# Altium PCB haptic_ring.PcbDoc
Units mil, origin at the board's own origin, x right, y up, seen from the top; angles counter-clockwise.
Board outline 6000 x 4000 mil, 2 copper layers (Top Layer, Bottom Layer); 10 components, 4 nets, 92 pads, 16 vias.
Unrouted connection lines stored in the file: 15.
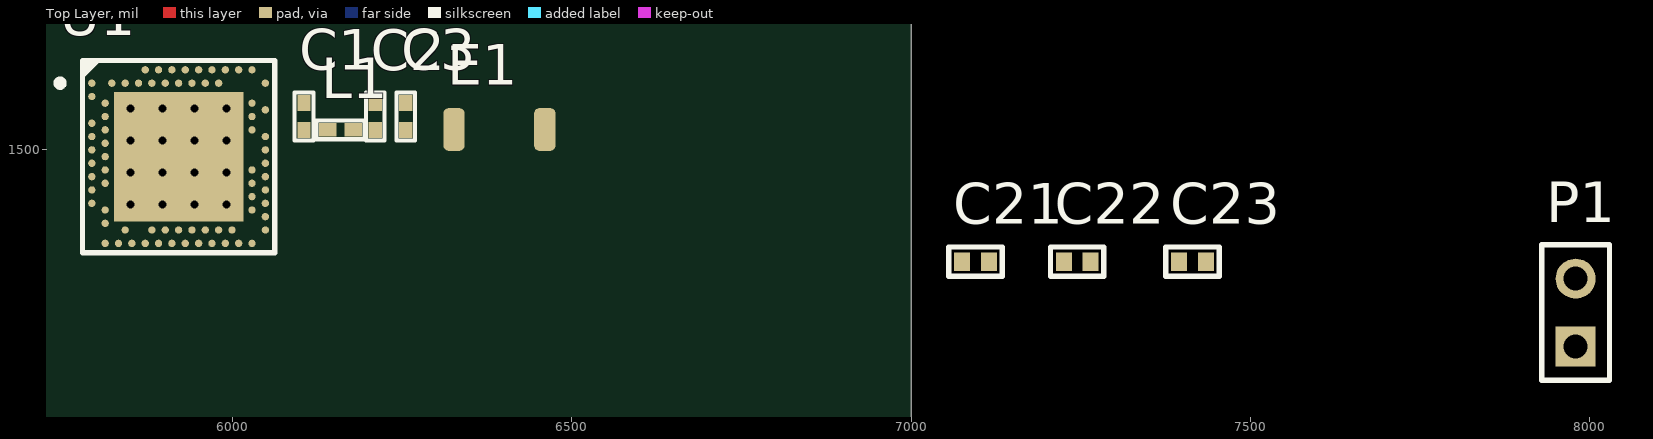
[diagram p0: Top Layer view]
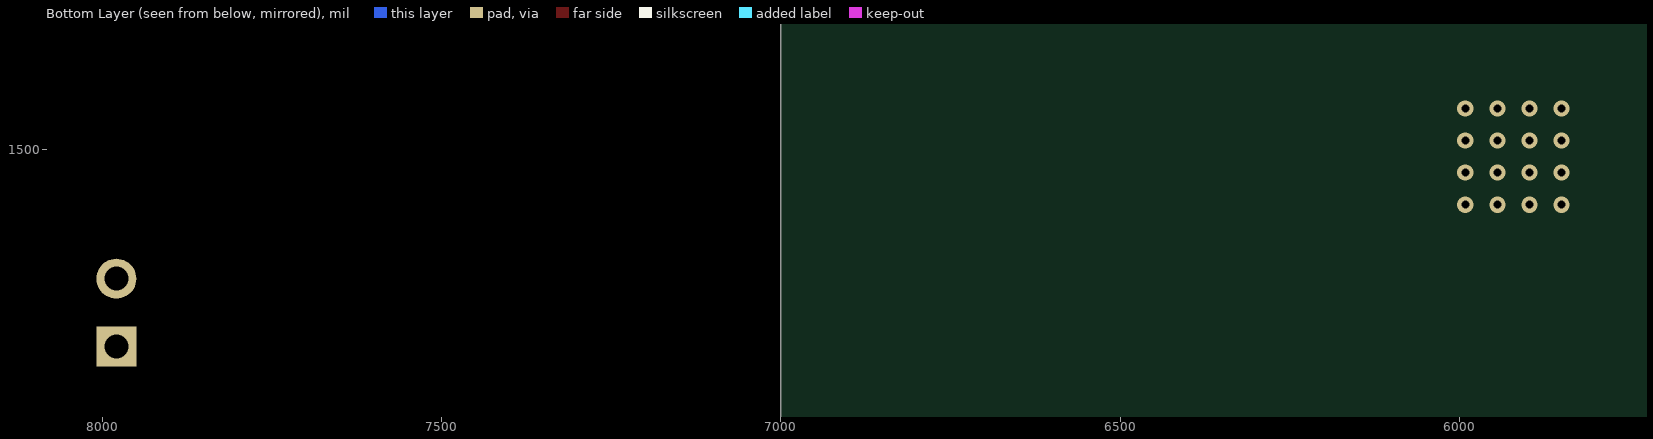
[diagram p1: Bottom Layer view, seen from below]

## Layer stack, top to bottom
Top Solder: solder mask 0.4, Solder Resist, Dk 3.5
Top Layer: signal copper 1.4
Dielectric 1: dielectric 12.6, FR-4, Dk 4.8
Bottom Layer: signal copper 1.4
Bottom Solder: solder mask 0.4, Solder Resist, Dk 3.5

## Board outline
1000,1000 7000,1000 7000,5000 1000,5000

## Design rules (kind name [scope] priority, off if disabled: settings)
Clearance [All] p1: gap=10 ignorepadtopadclearanceinfootprint=TRUE except(0: Arc-Hole Track-Hole SMDPad-Hole THPad-Hole Via-Hole Fill-Hole Poly-Hole Region-Hole Text-Hole)
PolygonConnect [All] p1: connectstyle=Relief reliefconductorwidth=10 reliefentries=4 polygonreliefangle="90 Angle" airgapwidth=10
RoutingVias [All] p1: holewidth=28 width=50 viastyle="Through Hole" minholewidth=28 minwidth=50 maxholewidth=28 maxwidth=50
SolderMaskExpansion [All] p1: expansion=4
Width [All] p1: maxlimit=10 minlimit=10 preferedwidth=10
30 further rules are at their usual default settings.

## Components (designator, comment, footprint, x,y, rotation, side; value= is the part's Value field where it differs from the comment)
C1 "0.8pF" C_1005 6105,1549.06 r270 top
C2 "0.5pF" C_1005 6210,1549.06 r270 top
C3 "N.C." C_1005 6255,1549.06 r90 top
C21 "Cap Semi" C_0402 7095,1335 r0 top value=10uF
C22 "Cap Semi" C_0402 7245,1335 r0 top value=10uF
C23 "Cap Semi" C_0402 7415,1335 r0 top value=100nF
E1 "Antenna" 2450AT18B100 6393.07,1530 r0 top
L1 "4.7nH" L_1005 6158.7,1529.37 r0 top
P1 "PWR" HDR1X2 7980,1210 r90 top
U1 "nRF52840-QIAA" AQFN50P700X700X85_HS-74N 5920,1490 r0 top

## Footprints (in the part's own frame and the unit in brackets; to place one, negate y for a bottom-side part, rotate by r counter-clockwise, add the part's x,y. Pads: shape width x height; smd on the part's side, far side on the other; paste and mask are expansions set on the pad)
2450AT18B100 [mm] "2450 MHz Antenna"
  rrect50% 0.8x1.6 smd: 1(-1.7,0) 2(1.7,0)
  body extent -1.6,-0.8 1.6,0.8, height 1.4
AQFN50P700X700X85_HS-74N [mm]
  rect 4.85x4.85 smd mask+0.05: 74(0,0)
  round 0.275 smd paste+0.012 mask+0.05: A8(-1.25,3.25) A10(-0.75,3.25) A12(-0.25,3.25) A14(0.25,3.25) A16(0.75,3.25) A18(1.25,3.25) A20(1.75,3.25) A22(2.25,3.25) A23(2.75,3.25) AA24(3.25,-2.25) AB2(-2.75,-2.5) AC5(-2,-2.75) AC9(-1,-2.75) AC11(-0.5,-2.75) AC13(0,-2.75) AC15(0.5,-2.75) AC17(1,-2.75) AC19(1.5,-2.75) AC21(2,-2.75) AC24(3.25,-2.75) AD2(-2.75,-3.25) AD4(-2.25,-3.25) AD6(-1.75,-3.25) AD8(-1.25,-3.25) AD10(-0.75,-3.25) AD12(-0.25,-3.25) AD14(0.25,-3.25) AD16(0.75,-3.25) AD18(1.25,-3.25) AD20(1.75,-3.25) AD22(2.25,-3.25) AD23(2.75,-3.25) B1(-3.25,2.75) B3(-2.5,2.75) B5(-2,2.75) B7(-1.5,2.75) B9(-1,2.75) B11(-0.5,2.75) B13(0,2.75) B15(0.5,2.75) B17(1,2.75) B19(1.5,2.75) B24(3.25,2.75) C1(-3.25,2.25) D2(-2.75,2) D23(2.75,2) E24(3.25,1.75) F2(-2.75,1.5) F23(2.75,1.5) G1(-3.25,1.25) H2(-2.75,1) H23(2.75,1) J1(-3.25,0.75) J24(3.25,0.75) K2(-2.75,0.5) L1(-3.25,0.25) L24(3.25,0.25) M2(-2.75,0) N1(-3.25,-0.25) N24(3.25,-0.25) P2(-2.75,-0.5) P23(2.75,-0.5) R1(-3.25,-0.75) R24(3.25,-0.75) T2(-2.75,-1) T23(2.75,-1) U1(-3.25,-1.25) U24(3.25,-1.25) V23(2.75,-1.5) W1(-3.25,-1.75) W24(3.25,-1.75) Y2(-2.75,-2) Y23(2.75,-2)
  silkscreen extent -4.56,-3.6 3.6,3.6, body extent -3.55,-3.55 3.55,3.55, height 0.85
C_0402 [mm]
  rect 0.6x0.7 smd: 1(-0.5,0) 2(0.5,0)
  silkscreen extent -1,-0.55 1,0.55, body extent -0.5,-0.3 0.5,0.3, height 0.2
C_1005 [mm]
  rect 0.6x0.5 smd: 1(-0.5,0) 2(0.5,0)
  silkscreen extent -0.9,-0.35 0.9,0.35, body extent -0.51,-0.25 0.51,0.25, height 0.5
HDR1X2 [mm] "Connector; Header; 2 Position"
  rect 1.5x1.5 hole 0.9: 1(0,0)
  round 1.5 hole 0.9: 2(2.54,0)
  silkscreen extent -1.27,-1.27 3.81,1.27
L_1005 [mm]
  rect 0.65x0.5 smd: 1(-0.475,0) 2(0.475,0)
  silkscreen extent -0.9,-0.35 0.9,0.35, body extent -0.5,-0.3 0.5,0.3, height 0.5

## Part data
C1: library part C0402-0.8p, "Capacitor, NP0, ±10%", Footprint Doc=0402, LatestRevisionDate=2012-11-21, Pad Count=2, Part Number=C0402-0.8p, Published=2009-05-08
C2: library part C0402-0.5p, "Capacitor, NP0, ±10%", Footprint Doc=0402, LatestRevisionDate=2017-02-23, Pad Count=2, Part Number=C0402-0.5p, Published=2009-05-08
C3: library part C0402-N.C., "Not mounted", Assembly="Not mounted", Footprint Doc=0402, LatestRevisionDate=2009-05-08, Pad Count=2, Part Number=C0402-N.C., Published=2009-05-08
C21 C22 C23: "Capacitor (Semiconductor SIM Model)", LatestRevisionDate=29-May-2009, LatestRevisionNote="IPC-7351 Footprint Added.", PackageDescription="Chip Capacitor", PackageReference=C1206, Published=8-Jun-2000, Publisher="Altium Limited"
E1: "Generic Antenna", LatestRevisionDate=17-Jul-2002, LatestRevisionNote="Re-released for DXP Platform.", PackageReference=PIN1, Published=24-Mar-1999, Publisher="Altium Limited"
L1: library part L0402-4n7, "High frequency chip inductor ±5%", Footprint Doc=0402, LatestRevisionDate=2012-09-19, Pad Count=2, Part Number=L0402-4n7, Published=2009-05-08
P1: library part "Header 2", "Header, 2-Pin", LatestRevisionDate=17-Jul-2002, LatestRevisionNote="Re-released for DXP Platform.", Publisher="Altium Limited"
U1: "Multi-protocol Bluetooth Low Energy, IEEE 802.15.4, ANT and 2.4GHz proprietary system-on-chip", Footprint Doc=AQFN-73, LatestRevisionDate=2017-08-21, Pad Count=73, Part Number=nRF52840-QIAA, Published=2017-08-21

## Via types
v1: diameter 24, hole 12, Top Layer to Bottom Layer, 16 vias

## Nets (pads, with @x,y where several pads share a name; then routed paths per layer and width w, separated by ;. In a path a pad name is that pad's centre, name@x,y a point inside that pad or via, vN(x,y) a via of type N, cw(c..) or ccw(c..) an arc to the next point about the centre after c; other vN are vias at no path point)
GND: C1.1 C2.1 C3.2 C21.1 C22.1 C23.1 P1.1 U1.F23
NetC1_2: C1.2 L1.1 U1.H23
NetC21_2: C21.2 C22.2 C23.2 P1.2
RF: C2.2 C3.1 E1.1 L1.2
pads on no net: E1.2 U1.74 U1.A8 U1.A10 U1.A12 U1.A14 U1.A16 U1.A18 U1.A20 U1.A22 U1.A23 U1.AA24 U1.AB2 U1.AC5 U1.AC9 U1.AC11 U1.AC13 U1.AC15 U1.AC17 U1.AC19 U1.AC21 U1.AC24 U1.AD2 U1.AD4 U1.AD6 U1.AD8 U1.AD10 U1.AD12 U1.AD14 U1.AD16 U1.AD18 U1.AD20 U1.AD22 U1.AD23 U1.B1 U1.B3 U1.B5 U1.B7 U1.B9 U1.B11 U1.B13 U1.B15 U1.B17 U1.B19 U1.B24 U1.C1 U1.D2 U1.D23 U1.E24 U1.F2 U1.G1 U1.H2 U1.J1 U1.J24 U1.K2 U1.L1 U1.L24 U1.M2 U1.N1 U1.N24 U1.P2 U1.P23 U1.R1 U1.R24 U1.T2 U1.T23 U1.U1 U1.U24 U1.V23 U1.W1 U1.W24 U1.Y2 U1.Y23
copper on no net:
  other v1: 5849.13,1419.13 5896.38,1419.13 5943.62,1419.13 5990.87,1419.13 5849.13,1466.38 5896.38,1466.38 5943.62,1466.38 5990.87,1466.38 5849.13,1513.62 5896.38,1513.62 5943.62,1513.62 5990.87,1513.62 5849.13,1560.87 5896.38,1560.87 5943.62,1560.87 5990.87,1560.87